# Altium PCB Blinker.PcbDoc
Units mil, origin at the board's own origin, x right, y up, seen from the top; angles counter-clockwise.
Board outline 2000 x 2000 mil, 2 copper layers (Top Layer, Bottom Layer); 8 components, 7 nets, 28 pads, 2 vias.
Unrouted connection lines stored in the file: 11.
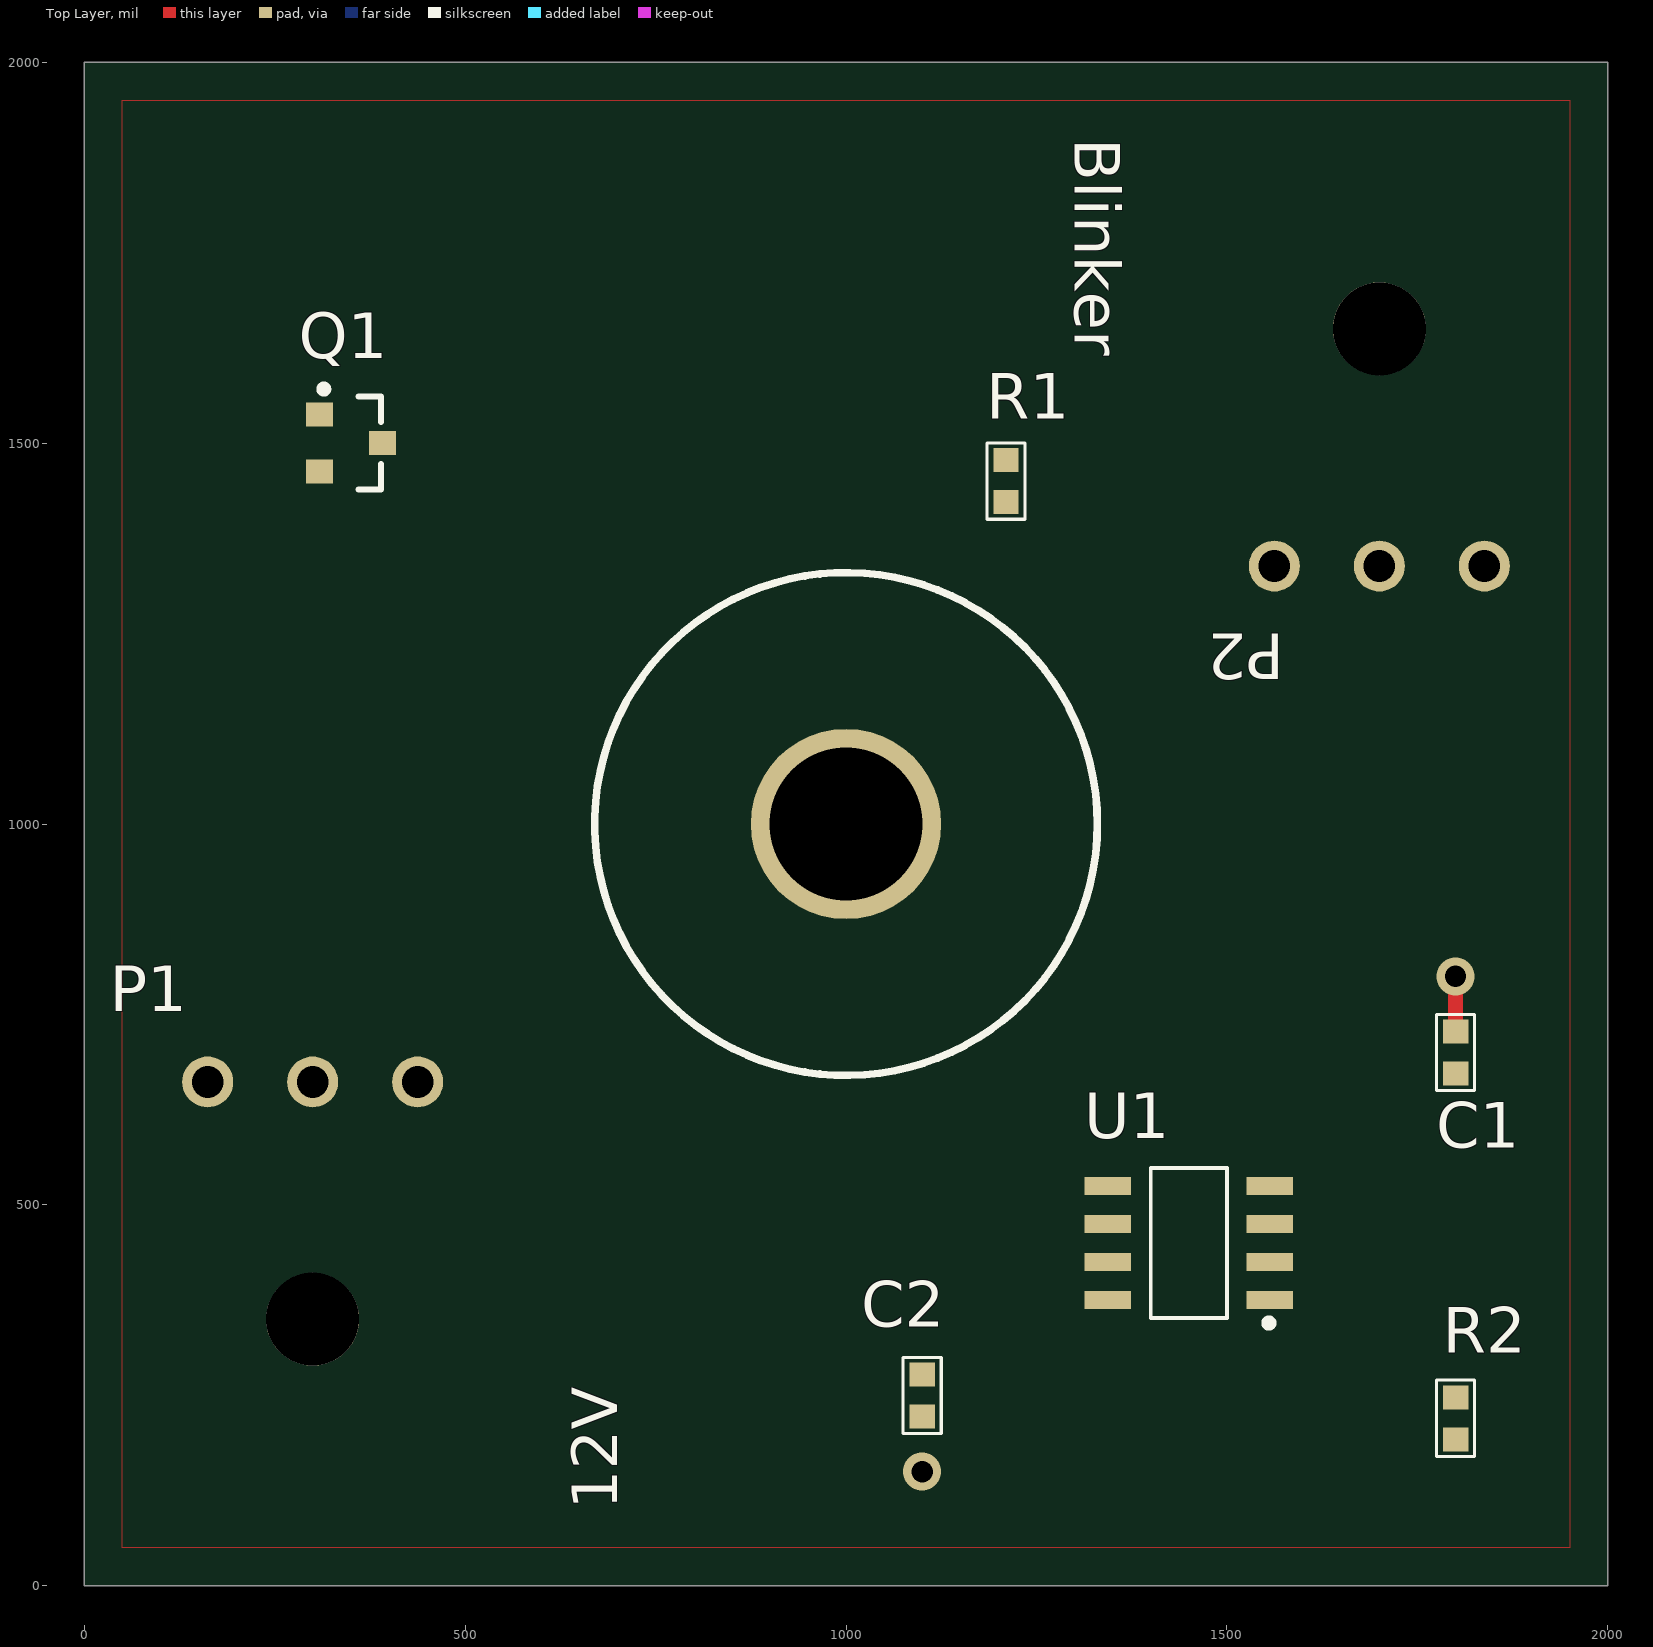
[diagram p0: Top Layer view]
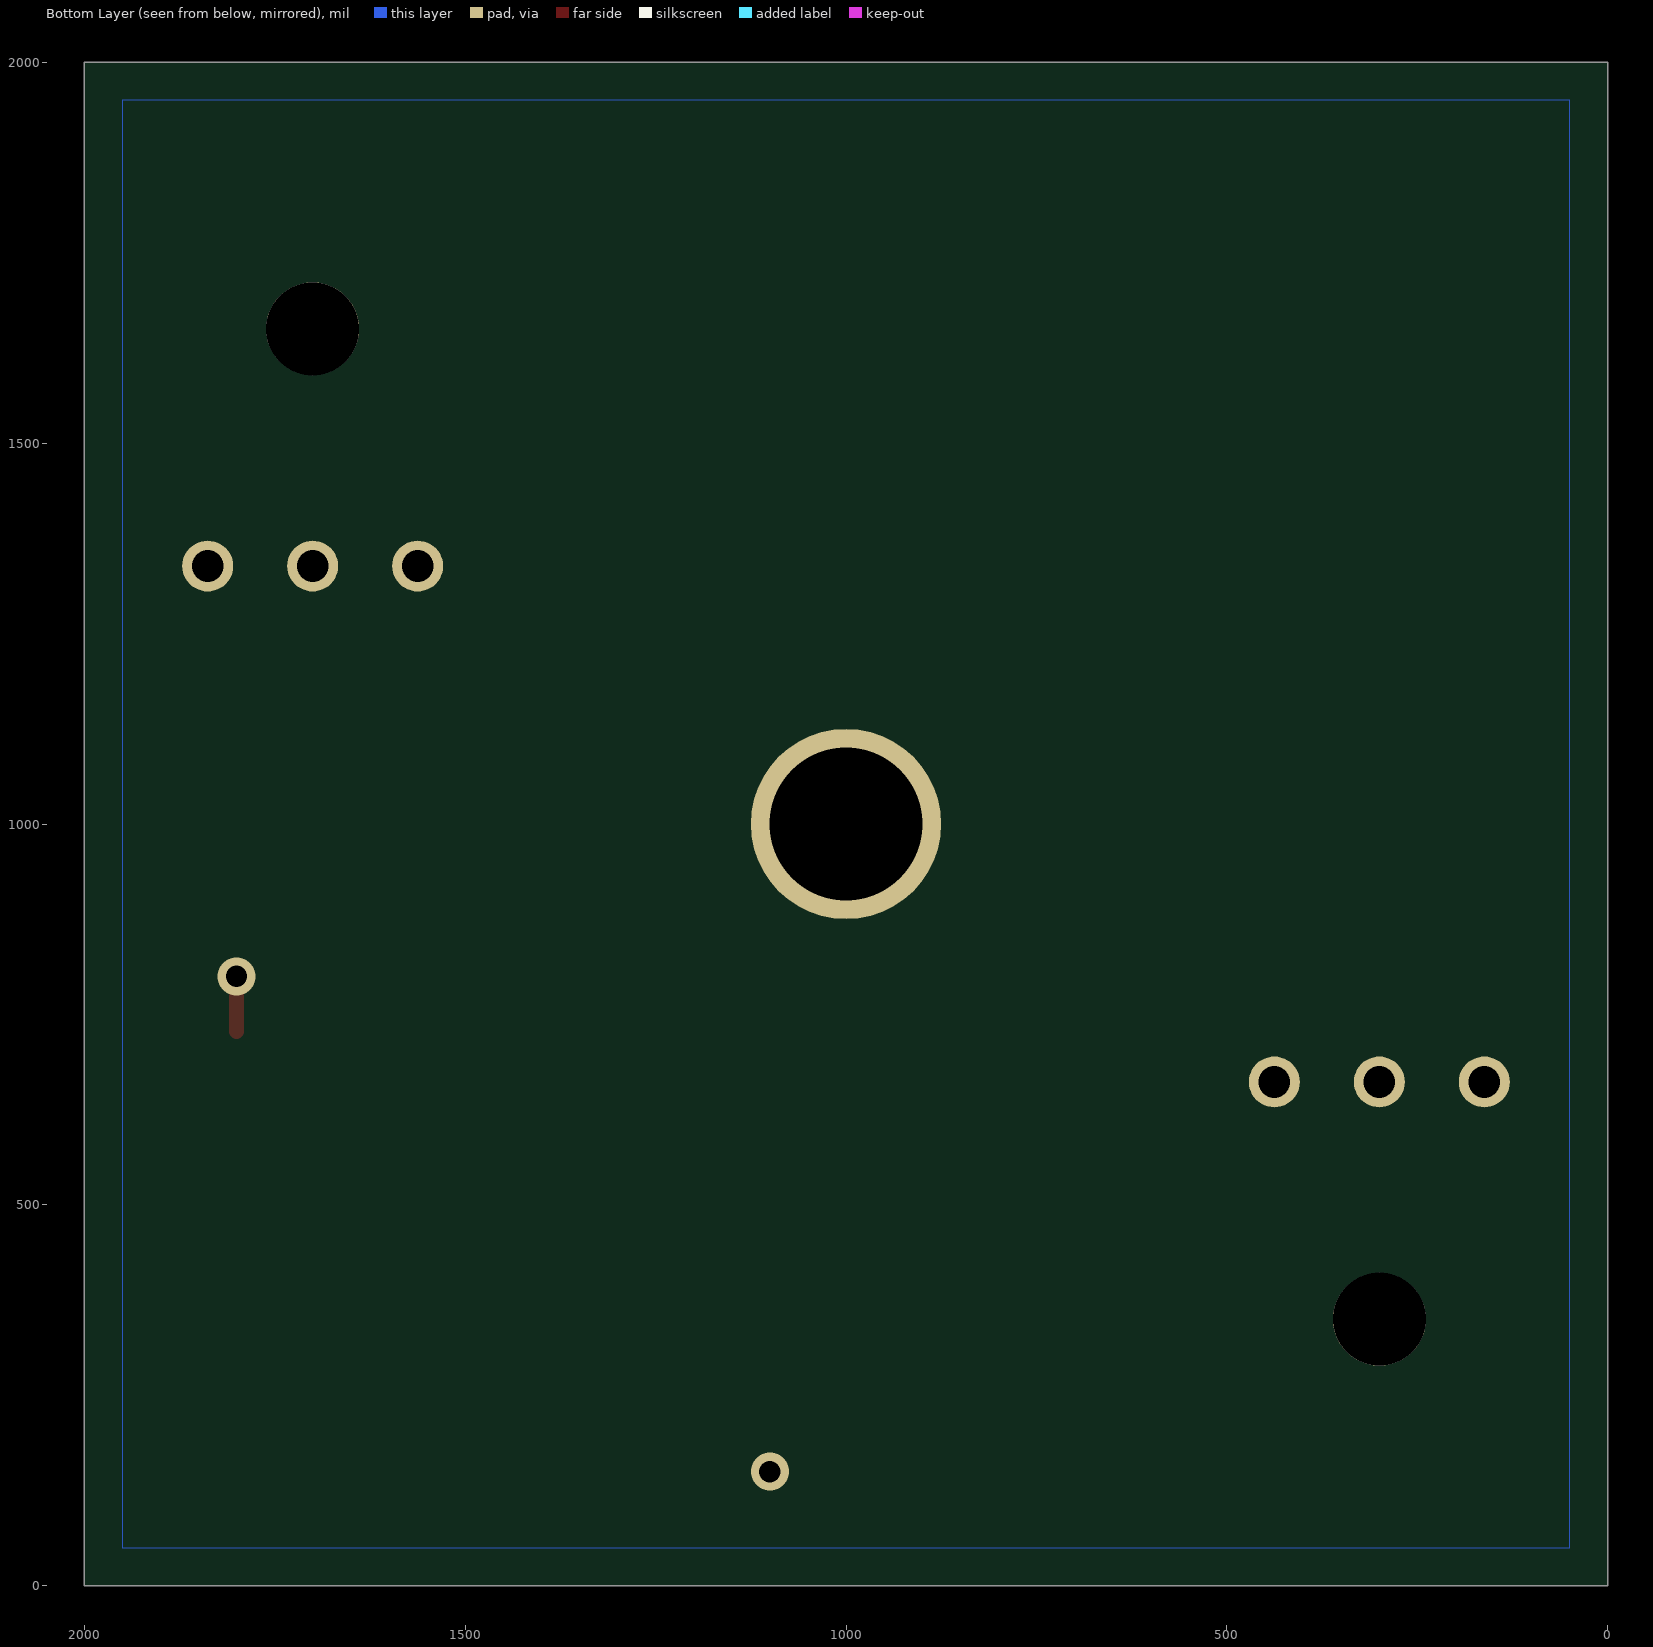
[diagram p1: Bottom Layer view, seen from below]

## Layer stack, top to bottom
Top Solder: solder mask 0.4, Solder Resist, Dk 3.5
Top Layer: signal copper 1.4
Dielectric 1: dielectric 12.6, FR-4, Dk 4.8
Bottom Layer: signal copper 1.4
Bottom Solder: solder mask 0.4, Solder Resist, Dk 3.5

## Board outline
0,0 0,2000 2000,2000 2000,0

## Design rules (kind name [scope] priority, off if disabled: settings)
Clearance [All] p1: gap=10 ignorepadtopadclearanceinfootprint=FALSE except(0: Arc-Hole Track-Hole SMDPad-Hole THPad-Hole Via-Hole Fill-Hole Poly-Hole Region-Hole Text-Hole)
PolygonConnect [All] p1: connectstyle=Relief reliefconductorwidth=10 reliefentries=4 polygonreliefangle="90 Angle" airgapwidth=10
RoutingVias [All] p1: holewidth=28 width=50 viastyle="Through Hole" minholewidth=28 minwidth=50 maxholewidth=28 maxwidth=50
SolderMaskExpansion [All] p1: expansion=4
Width [All] p1: maxlimit=60 minlimit=20 preferedwidth=40 minimp=50.000000 maximp=50.000000 favimp=50.000000
30 further rules are at their usual default settings.

## Components (designator, comment, footprint, x,y, rotation, side; value= is the part's Value field where it differs from the comment)
C1 "NPCAP" CAPC1608X06L 1800,700 r270 top value=4.7uF
C2 "NPCAP" CAPC1608X06L 1100,250 r90 top value=0.01uF
P1 "Molex Ultrafit 3x1" Molex-Ultrafit-3x1 300,350 r0 top
P2 "Molex Ultrafit 3x1" Molex-Ultrafit-3x1 1700,1650 r180 top
Q1 "PFET" SOT95P237X112-3N 350,1500 r0 top
R1 "RES" RESC1608X06L 1210,1450 r90 top value=4.7k
R2 "RES" RESC1608X06L 1800,220 r270 top value=100k
U1 "LMC555CMx/LMC555CN/LMC555IM" D-8 1450,450 r90 top

## Footprints (in the part's own frame and the unit in brackets; to place one, negate y for a bottom-side part, rotate by r counter-clockwise, add the part's x,y. Pads: shape width x height; smd on the part's side, far side on the other; paste and mask are expansions set on the pad)
CAPC1608X06L [mm] "Chip Capacitor, 2-Leads, Body 1.60x0.80mm, IPC High Density"
  rect 0.8x0.85 smd: 1(-0.7,0) 2(0.7,0)
  silkscreen extent -1.27,-0.64 1.27,0.64, body extent -0.85,-0.45 0.85,0.45, height 0.55
D-8 [mm] "SOIC-8"
  rect 0.6x1.55 smd: 1(-1.905,-2.7) 2(-0.635,-2.7) 3(0.635,-2.7) 4(1.905,-2.7) 5(1.905,2.7) 6(0.635,2.7) 7(-0.635,2.7) 8(-1.905,2.7)
  silkscreen extent -2.79,-2.79 2.5,1.27, body extent -2.5,-2 2.5,2, height 1.75
Molex-Ultrafit-3x1 [mm] "Molex Ultrafit 3x1 - 172310-1303"
  round 3.1 hole 3.1 unplated: 0(0,0)
  round 1.7 hole 1.06: 1(-3.5,7.91) 2(0,7.91) 3(3.5,7.91)
  body extent -6.25,-7.33 6.25,8.3, height 8.96
RESC1608X06L [mm] "Chip Resistor, 2-Leads, Body 1.60x0.80mm, IPC High Density"
  rect 0.8x0.85 smd: 1(-0.7,0) 2(0.7,0)
  silkscreen extent -1.27,-0.64 1.27,0.64, body extent -0.85,-0.45 0.85,0.45, height 0.55
SOT95P237X112-3N [mm] "SOT23, 3-Leads, Body 2.92x2.37mm, Pitch 0.95mm, IPC Medium Density"
  rect 0.9x0.8 smd: 1(-1.05,0.95) 2(-1.05,-0.95) 3(1.05,0)
  silkscreen extent -1.02,-1.55 1,1.92, body extent -0.9,-1.45 0.9,1.45, height 0.8

## Part data
C1 C2: "Nonpolar capacitor, 2 pin"
P1 P2: library part Molex-Ultrafit-3x1, "Molex Ultrafit 3x1 - 172310-1303"
Q1: "MOSFET P CH"
R1 R2: "Resistor, 2 pin"
U1: Part Number=LMC555CMX/NOPB

## Free pads (board coordinates)
  round 250 hole 201: 3(1000,1000)

## Via types
v1: diameter 50, hole 28, Top Layer to Bottom Layer, 2 vias

## Nets (pads, with @x,y where several pads share a name; then routed paths per layer and width w, separated by ;. In a path a pad name is that pad's centre, name@x,y a point inside that pad or via, vN(x,y) a via of type N, cw(c..) or ccw(c..) an arc to the next point about the centre after c; other vN are vias at no path point)
12V: P1.2 Q1.2 R1.2 U1.4 U1.8
GND: C1.1 C2.1 P1.1 P1.3 P2.1 P2.3 U1.1 | length 72.4
  Top Layer w20: C1.1 v1(1800,800)
  other v1: 1100,150
NetC1_2: C1.2 R2.1 U1.2 U1.6
NetC2_2: C2.2 U1.5
NetP2_2: P2.2 Q1.3
NetQ1_1: Q1.1 U1.3
NetR1_1: R1.1 R2.2 U1.7
pads on no net: P1.0 P2.0

## Polygon pours and split planes (outlines as drawn)
12V on Top Layer "Top Layer-12V" (solid, shelved, pour order 2): 50,50 50,1950 1950,1950 1950,50
GND on Bottom Layer "Top Layer-GND" (solid, shelved, pour order 3): 50,50 50,1950 1950,1950 1950,50

## Silkscreen, mask and mechanical layers (free items; w line width, h text height)
Top Overlay:
  circle w10: c1000,1000 r330
  text "Blinker" at 1300,1900 h60 r270
  text "12V" at 700,100 h60 r90